# EAGLE board relay-simple (EAGLE 6.4)
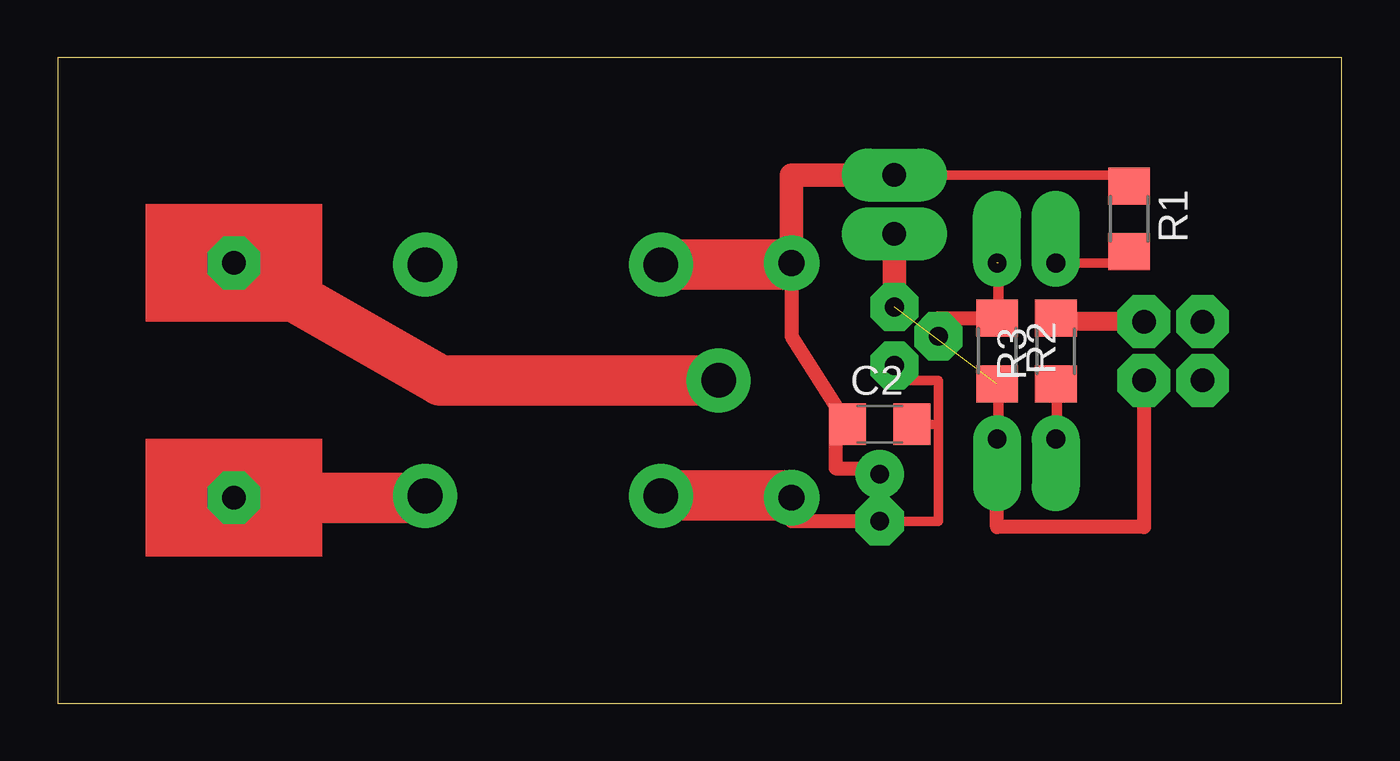
[diagram p0: board, top side]
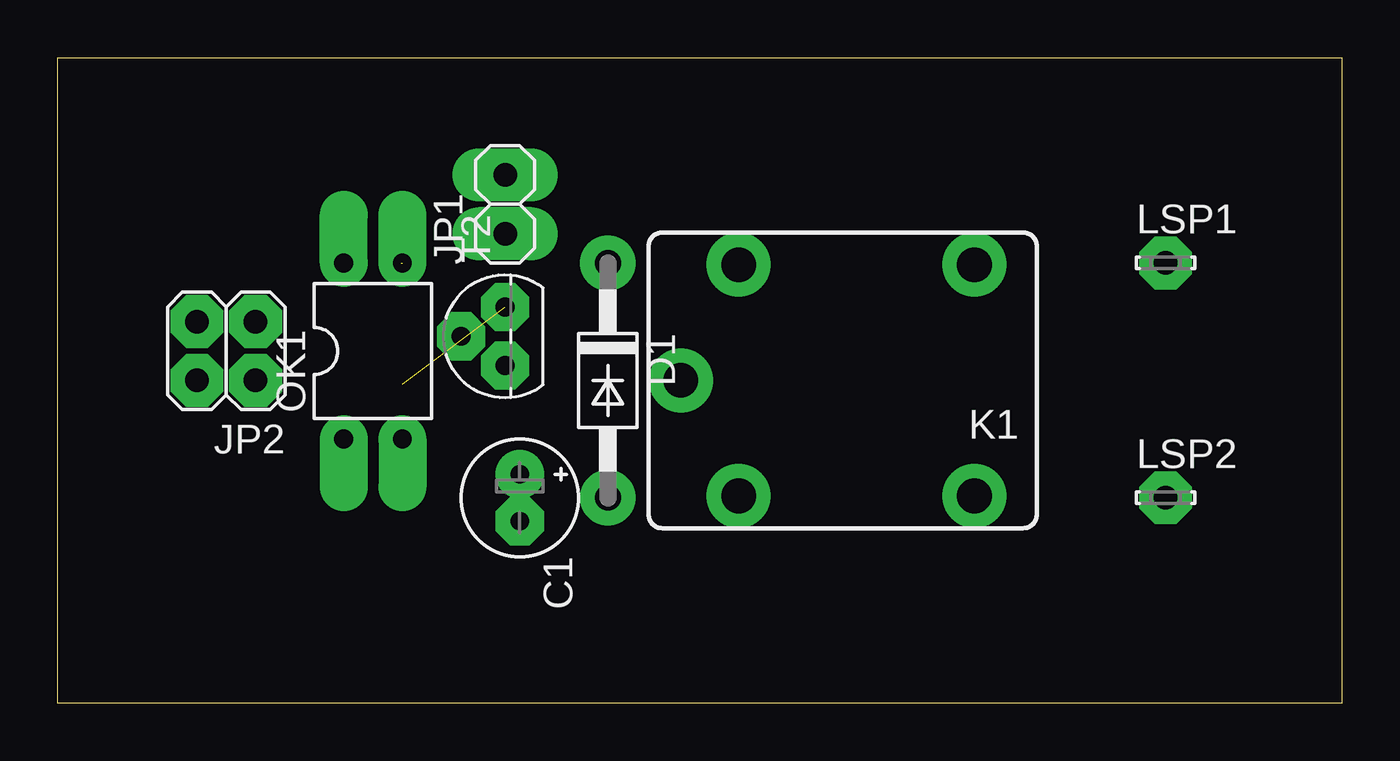
[diagram p1: board, bottom side, seen from below]

Size 55.55 x 27.93 mm. Coordinates in mm from the lower left corner, seen from the top.
Outline: 0,0 55.55,0 55.55,27.93 0,27.93 0,0
Copper layers (1*16): Top 0.035mm / dielectric 1.5mm / Bottom 0.035mm
Design rules "default *": minimum track width 18mil, minimum drill 32mil, track to track 12mil, track to pad 12mil, pad to pad 12mil, via to via 12mil, smd to smd 8mil, copper to edge 40mil, drill to drill 8mil, minimum pad ring 25mil, minimum via ring 12mil, stop-mask expansion 4mil, vias tented up to drill 0mil, thermal gap 20mil
Net classes: 0 default: width 0.457 mm; 1 power: width 1.219 mm

## Footprints (pad centres in the part's own frame; a part is rotated, then mirrored left to right if it is on the bottom)
E2-5 = drill 0.813 pad 1.27: + -1.016,0 | drill 0.813 pad 1.27 octagon: - 1.016,0
C1206 = smd 1.6 x 1.8: 1 -1.4,0; 2 1.4,0
DO41-10 = drill 1.118: A 5.08,0; C -5.08,0
1X02 = drill 1.016 long: 1 -1.27,0; 2 1.27,0
2X02 = drill 1.016 octagon: 1 -1.27,-1.27; 2 -1.27,1.27; 3 1.27,-1.27; 4 1.27,1.27
CQ1 = drill 1.5: 1 4.5,-5; 2 4.5,5; C 7,0; NC -5.7,-5; NO -5.7,5
LSP10 = drill 1.016 pad 2.159 octagon: MP 0,0
DIL04 = drill 0.813 offset: 1 -1.27,-3.81; 2 1.27,-3.81; 3 1.27,3.81; 4 -1.27,3.81
R1206 = smd 1.6 x 1.803: 1 -1.422,0; 2 1.422,0
TO92 = drill 0.813 octagon: 1 1.27,0; 2 0,1.905; 3 -1.27,0

## Placement (x,y rotation side)
C1  [E2-5]  35.56,8.89 270 bottom
C2  [C1206]  35.56,12.06 0 top
D1  1N4004  [DO41-10]  31.75,13.97 270 bottom
JP1  [1X02]  36.2,21.59 90 bottom
JP2  [2X02]  48.26,15.24 180 bottom
K1  CQ1-12V  [CQ1]  21.59,13.97 180 bottom
LSP1  LSP10  [LSP10]  7.62,19.05 0 bottom
LSP2  LSP10  [LSP10]  7.62,8.89 0 bottom
OK1  PC817  [DIL04]  41.91,15.24 0 bottom
R1  [R1206]  46.35,20.95 270 top
R2  [R1206]  40.64,15.24 270 top
R3  [R1206]  43.18,15.24 90 top
T2  [TO92]  36.2,15.88 90 bottom

## Library data of the parts
C1 C2 R1-R3 = rcl
D1 = diode
JP1 JP2 = pinhead
K1 = relay; OC_FARNELL: unknown; OC_NEWARK: unknown
LSP1 LSP2 = solpad
OK1 = optocoupler; MPN: PC817X4J000F; OC_FARNELL: 9707727; OC_NEWARK: 97K7059
T2 = transistor

## Nets
+12V: C1.+ C2.1 D1.C JP1.2 K1.1 R1.1
GND: JP1.1 JP2.2 OK1.2 R2.2 T2.1
N$1: OK1.3 R2.1 T2.2
N$2: C1.- C2.2 D1.A K1.2 T2.3
N$3: OK1.4 R1.2
N$4: OK1.1 R3.1
N$5: JP2.1 R3.2
N$6 [power]: K1.C LSP1.MP
N$7 [power]: K1.NO LSP2.MP

## Tracks (layer width: path | path; a pad name or v marks a point on that pad's centre or on a via)
+12V
  Top 0.406: JP1.2 46.51,22.86 R1.1
  Top 0.61: 31.75,18.97 31.75,15.88 C2.1 33.66,12.06 33.66,10.16 35.56,10.16 C1.+
  Top 0.813: 31.75,18.97 D1.C
  Top 1.016: JP1.2 31.75,22.86 D1.C
  Top 2.184: K1.1 31.75,18.97
GND  (1 unrouted)
  Top 0.457: 40.69,11.43 40.69,13.77 R2.2
  Top 0.61: JP2.2 46.99,7.62 40.64,7.62 OK1.2
  Top 0.813: 40.69,11.43 OK1.2
  Top 1.016: JP1.1 T2.1
N$1  (1 unrouted)
  Top 0.457: 40.69,19.05 40.69,16.71 R2.1
  Top 0.61: T2.2 38.1,16.66 R2.1
N$2
  Top 0.406: T2.3 36.2,13.97 38.1,13.97 38.1,12.06 | 38.1,12.06 38.1,7.87 C1.- | C2.2 36.96,11.43 36.83,11.43 36.83,12.06 38.1,12.06
  Top 0.457: 26.16,8.99 K1.2 | 31.55,8.99 D1.A
  Top 0.61: C1.- 31.75,7.87 D1.A
  Top 2.184: 31.55,8.99 26.16,8.99
N$3
  Top 0.406: R1.2 46.2,19.05 OK1.4
N$4
  Top 0.457: R3.1 43.23,13.77 43.23,11.43 OK1.1
N$5
  Top 0.813: JP2.1 43.18,16.51 R3.2
N$6
  Top 1.219: 7.67,19.05 LSP1.MP
  Top 2.184: 7.67,19.05 16.56,13.97 K1.C
N$7
  Top 1.219: 15.8,8.89 K1.NO
  Top 2.184: 15.8,8.89 LSP2.MP
(copper drawn outside any net)
  shapes: Top area x2